# EAGLE board untitled (EAGLE 8.7.1)

Size 160 x 100 mm. Coordinates in mm from the lower left corner, seen from the top.
Outline: 0,0 160,0 160,100 0,100 0,0
Copper layers (1*16): Top 0.035mm / dielectric 1.5mm / Bottom 0.035mm
Design rules "default": minimum track width 6mil, minimum drill 0.35mm, track to track 6mil, track to pad 6mil, pad to pad 6mil, via to via 6mil, smd to smd 6mil, copper to edge 40mil, drill to drill 6mil, minimum pad ring 10mil, minimum via ring 8mil, stop-mask expansion 4mil, vias tented up to drill 0mil, thermal gap 10mil

## Footprints (pad centres in the part's own frame; a part is rotated, then mirrored left to right if it is on the bottom)
PCA9615 = smd 0.95 x 0.15: DSCLM 2,-1; DSCLP 2,-0.5; DSDAM 2,0.5; DSDAP 2,0; EN -2,0; SCL -2,-0.5; SDA -2,0.5; VDD(A) -2,1; VDD(B) 2,1; VSS -2,-1

## Placement (x,y rotation side)
U$1  PCA9615  [PCA9615]  -20.32,2.54 0 top  (outside the outline)
U$2  PCA9615  [PCA9615]  -30.48,2.54 0 top  (outside the outline)
U$3  PCA9615  [PCA9615]  -20.32,7.62 0 top  (outside the outline)
U$4  PCA9615  [PCA9615]  -30.48,7.62 0 top  (outside the outline)
U$5  PCA9615  [PCA9615]  -20.32,12.7 0 top  (outside the outline)
U$6  PCA9615  [PCA9615]  -30.48,12.7 0 top  (outside the outline)
U$7  PCA9615  [PCA9615]  -20.32,17.78 0 top  (outside the outline)
U$8  PCA9615  [PCA9615]  -30.48,17.78 0 top  (outside the outline)
U$9  PCA9615  [PCA9615]  -20.32,22.86 0 top  (outside the outline)
U$10  PCA9615  [PCA9615]  -30.48,22.86 0 top  (outside the outline)
U$11  PCA9615  [PCA9615]  -20.32,27.94 0 top  (outside the outline)
U$12  PCA9615  [PCA9615]  -30.48,27.94 0 top  (outside the outline)
U$13  PCA9615  [PCA9615]  -20.32,33.02 0 top  (outside the outline)
U$14  PCA9615  [PCA9615]  -30.48,33.02 0 top  (outside the outline)
U$15  PCA9615  [PCA9615]  -20.32,38.1 0 top  (outside the outline)
U$16  PCA9615  [PCA9615]  -30.48,38.1 0 top  (outside the outline)

## Library data of the parts
U$1-U$16 = PCA9615

## Nets
VDD: U$10.VDD(A) U$10.VDD(B) U$15.VDD(A) U$15.VDD(B) U$16.VDD(A) U$16.VDD(B)

## Tracks (layer width: path | path; a pad name or v marks a point on that pad's centre or on a via)
VDD  (5 unrouted)